# Altium PCB LASERDIODE_FIX.PcbDoc (part 3 of 4)
Units mm, origin at the board's own origin, x right, y up, seen from the top; angles counter-clockwise.
Board outline 85 x 85 mm, 4 copper layers (Top Layer, Mid-Layer 1, Mid-Layer 2, Bottom Layer); 546 components, 363 nets, 1494 pads, 1079 vias.
Unrouted connection lines stored in the file: 1020.
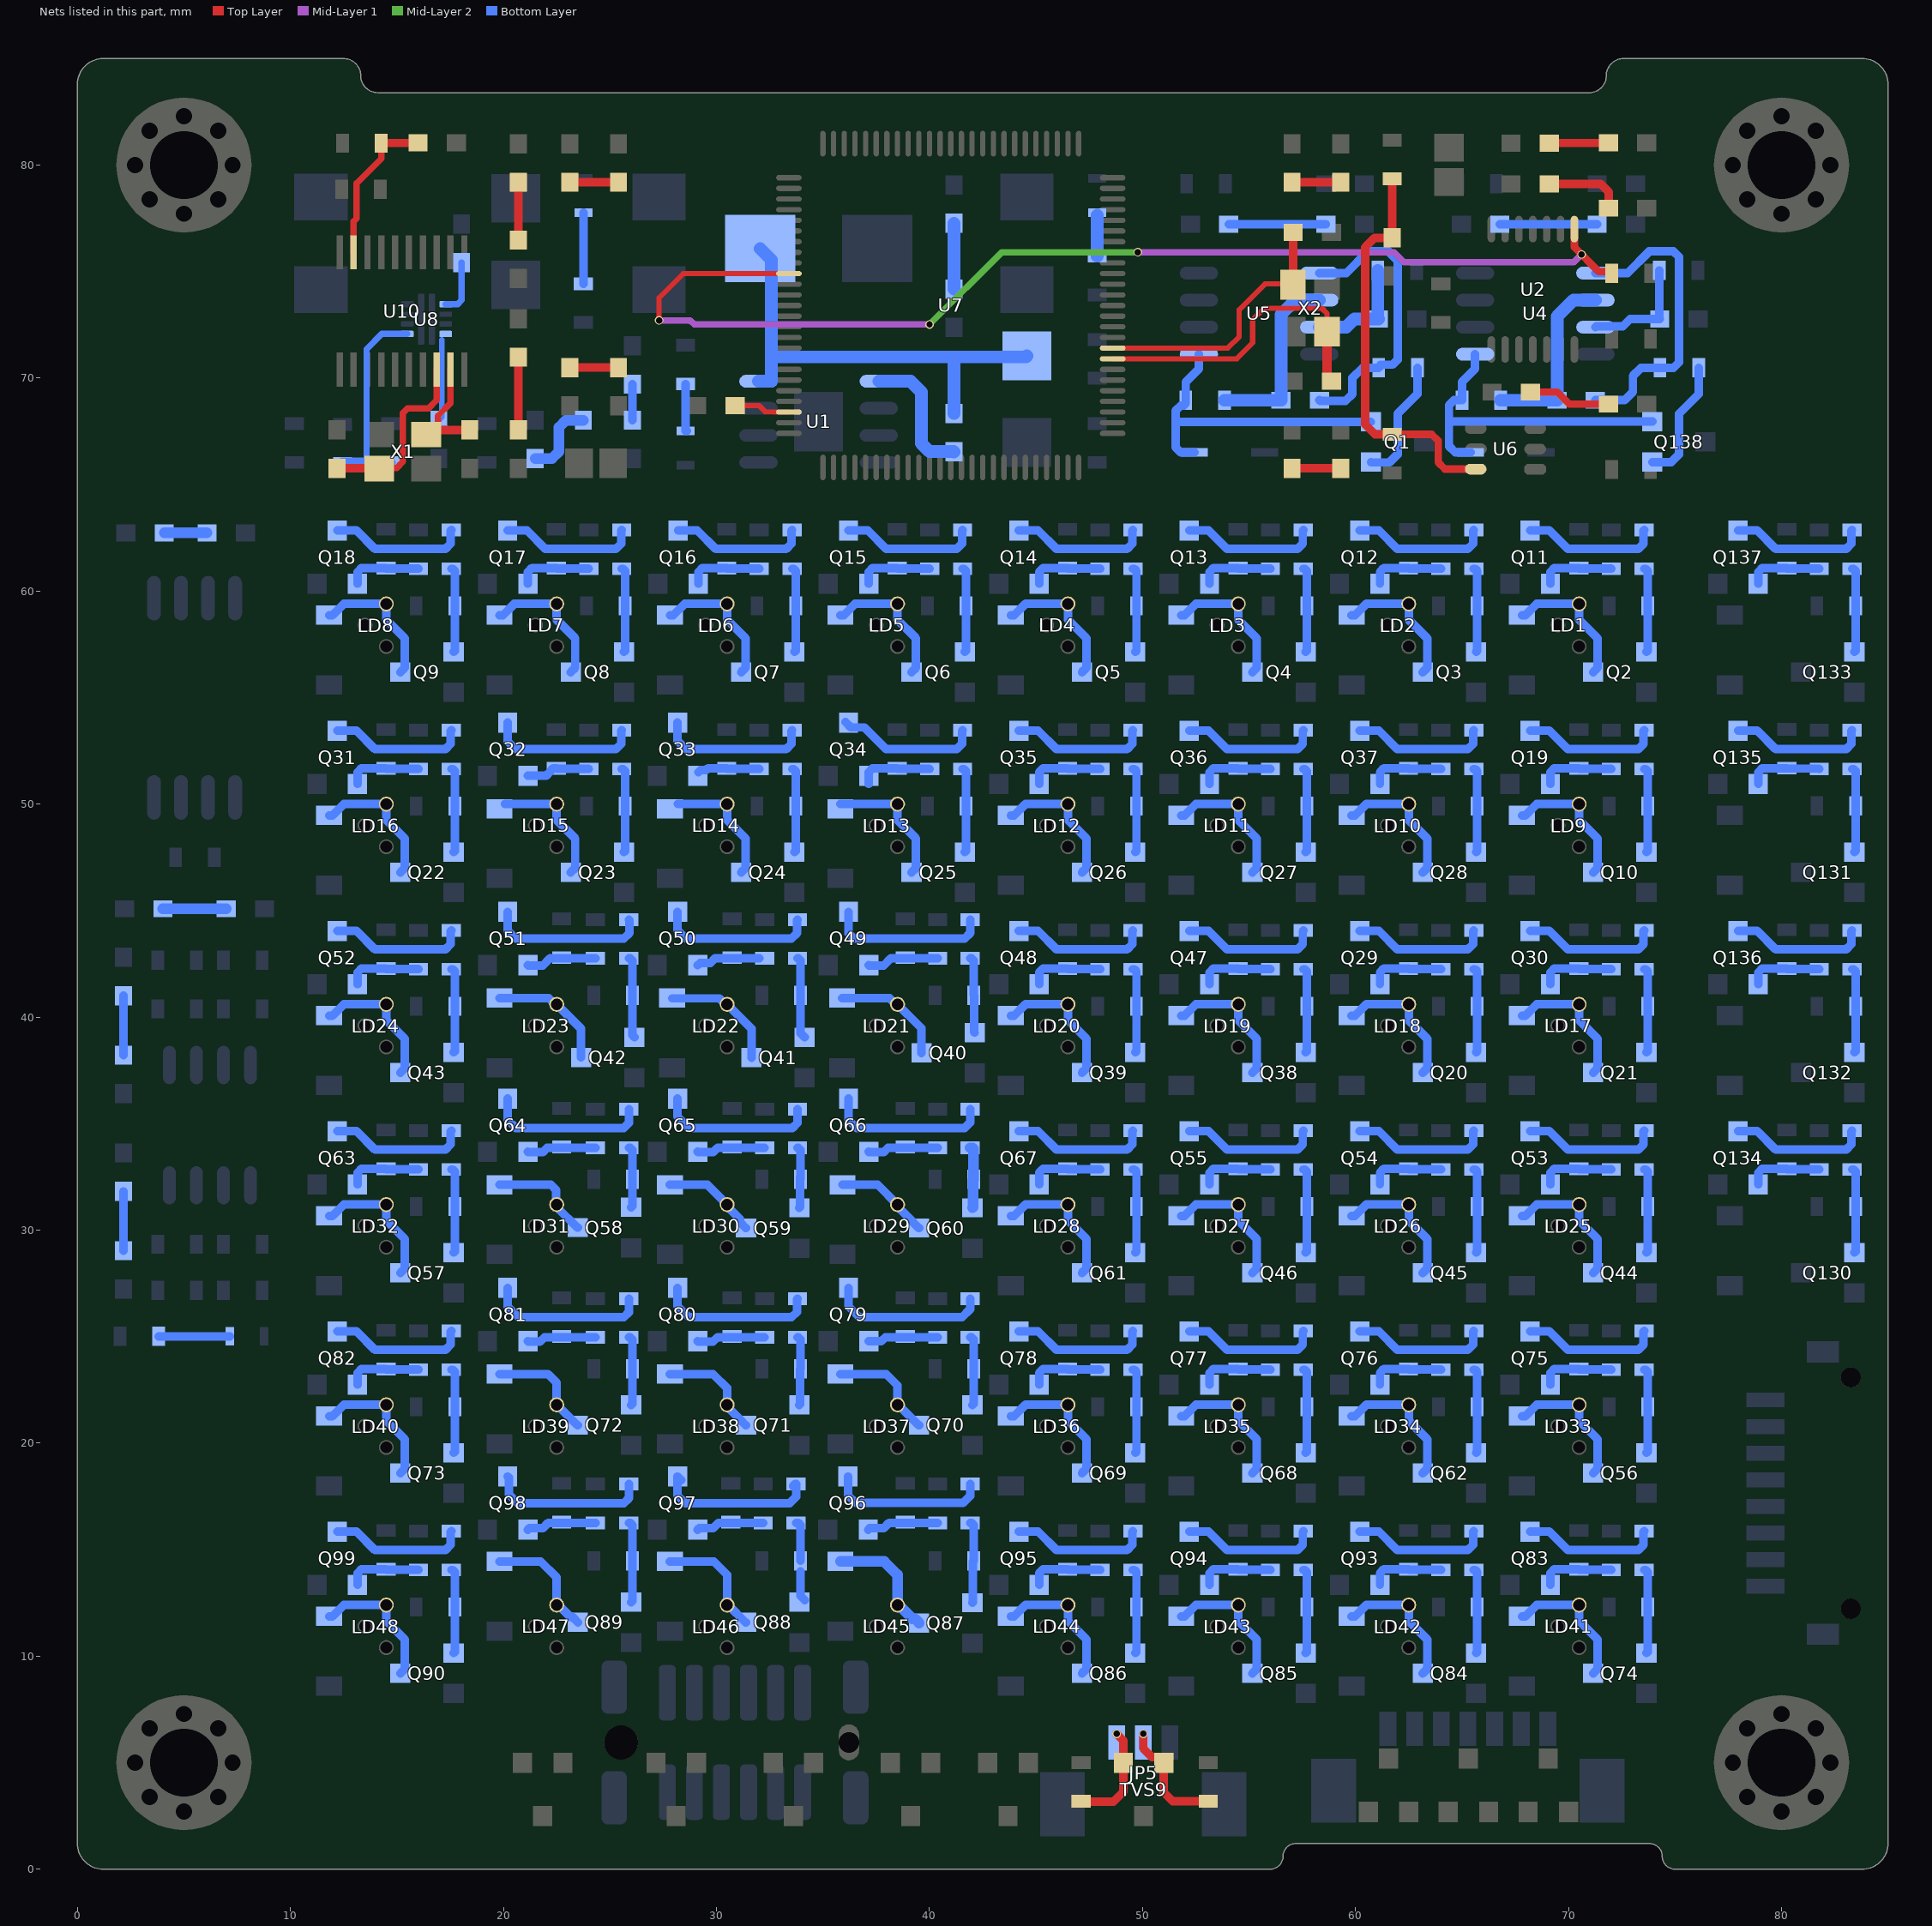
[diagram p5: the nets of this part, all layers, seen from the top]

## Via types
v1: diameter 0.4, hole 0.3, Top Layer to Bottom Layer, tented both sides, 1079 vias

## Nets (pads, with @x,y where several pads share a name; then routed paths per layer and width w, separated by ;. In a path a pad name is that pad's centre, name@x,y a point inside that pad or via, vN(x,y) a via of type N, cw(c..) or ccw(c..) an arc to the next point about the centre after c; other vN are vias at no path point) (continued)
LATCH: R218.2 U2.8 U7.85 | length 55.9
  Top Layer w0.25: v1@27.349,72.705 27.32,72.734 27.32,72.802 27.305,72.817 27.305,73.769 28.442,74.906 U7.85@33.4,74.906
  Top Layer w0.35: U2.8@70.276,76.993 70.276,76.141 71.415,75.001 71.91,75.001 72.001,74.911 R218.2@72.035,74.911
  Mid-Layer 1 w0.3: v1(27.305,72.705) 28.768,72.705 28.956,72.517 v1(40.005,72.517) ; v1(49.784,75.906) 61.813,75.906 62.281,75.438 70.247,75.438 v1(70.612,75.803)
  Mid-Layer 2 w0.3: v1(40.005,72.517) 43.394,75.906 v1(49.784,75.906)
NetC1_1: C1.1 C68.2 | length 3.7
  Bottom Layer w0.5: C1.1@21.488,66.22 22.278,66.22 22.606,66.548 22.606,67.691 22.935,68.02 C68.2@23.749,68.02
NetC3_2: C3.2 U8.10 | length 3.8
  Bottom Layer w0.25: C3.2@16.967,68.02 17.108,68.161 17.108,71.795
NetC4_2: C4.2 U8.7 | length 2.6
  Bottom Layer w0.3: U8.7@17.287,73.471 17.845,73.471 18.034,73.66 C4.2@18.034,75.427
NetC5_1: C5.1 D2.2 L1.1 U1.8 | length 21.7
  Bottom Layer w0.6: U1.8@31.973,69.85 32.572,69.85 32.572,70.993 ; L1.1@32.048,76.082 32.572,75.558 32.572,70.993 ; C5.1@41.148,68.337 41.148,70.993 ; D2.2@44.577,71.043 44.527,70.993 41.148,70.993 ; 32.572,70.993 41.148,70.993
NetC5_2: C5.2 U1.1 | length 6.3
  Bottom Layer w0.6: U1.1@37.623,69.85 39.116,69.85 39.624,69.342 39.624,66.929 40.005,66.548 41.137,66.548 C5.2@41.148,66.537
NetC6_2: C6.2 C12.1 | length 1.7
  Bottom Layer w0.4: C12.1@26.06,68.02 C6.2@26.06,69.712
NetC7_1: C7.1 R288.2 U10.19 | length 7.4
  Top Layer w0.3: U10.19@12.965,75.902 12.965,77.354 13.095,77.484 13.095,79.135 14.262,80.302 R288.2@14.262,81.026 R288.2@14.271,81.036
  Top Layer w0.4: R288.2@14.262,81.026 14.271,81.036 15.981,81.036 C7.1@15.991,81.045
NetC8_1: C8.1 U10.8 X1.3 | length 8.8
  Top Layer w0.3: X1.3@14.168,65.751 14.203,65.786 14.986,65.786 15.273,66.073 15.273,68.359 15.494,68.58 16.477,68.58 16.865,68.968 U10.8@16.865,70.402
  Top Layer w0.4: C8.1@12.192,65.764 14.154,65.764 X1.3@14.168,65.751
NetC9_2: C9.2 C15.1 | length 3.1
  Bottom Layer w0.6: C15.1@41.148,74.179 C9.2@41.148,77.268
NetC14_2: C14.2 C42.1 | length 2.8
  Bottom Layer w0.4: C42.1@2.159,38.214 C14.2@2.159,41.005
NetC19_1: C19.1 C63.2 | length 3.7
  Top Layer w0.4: C19.1@69.099,79.121 71.501,79.121 71.882,78.74 71.882,77.99 C63.2@71.871,77.979
NetC20_1: C20.1 C21.2 | length 3.9
  Top Layer w0.35: C20.1@68.21,69.342 69.469,69.342 70.032,68.779 C21.2@71.871,68.779
NetC22_2: C22.2 C26.1 | length 2
  Bottom Layer w0.5: C22.2@4.075,62.736 C26.1@6.085,62.736
NetC23_2: C23.2 C28.1 | length 3
  Bottom Layer w0.5: C23.2@4.012,45.085 C28.1@6.985,45.085
NetC24_2: C24.2 R309.2 U4.3 | length 5.5
  Bottom Layer w0.4: U4.3@71.265,72.39 71.303,72.428 72.555,72.428 72.898,72.771 C24.2@74.284,72.771 74.271,72.785 74.271,75.044 R309.2@74.257,75.057
NetC25_1: C25.1 R314.1 U4.2 | length 8.7
  Bottom Layer w0.6: R314.1@66.814,68.961 C25.1@69.458,68.961 69.469,68.972 69.469,72.898 70.231,73.66 U4.2@71.265,73.66
NetC25_2: C25.2 R311.1 U4.1 | length 14.5
  Bottom Layer w0.4: C25.2@71.258,68.961 72.635,68.961 73.025,69.351 73.025,70.104 73.405,70.484 R311.1@74.295,70.484 ; U4.1@71.265,74.93 72.771,74.93 73.787,75.946 74.93,75.946 75.184,75.692 75.184,70.739 74.93,70.485 R311.1@74.295,70.484
NetC27_1: C27.1 C29.2 | length 4.6
  Bottom Layer w0.4: C27.1@66.778,77.216 C29.2@71.342,77.216
NetC30_1: C30.1 C64.2 | length 2.8
  Top Layer w0.4: C30.1@69.099,81.026 69.109,81.036 71.861,81.036 C64.2@71.871,81.045
NetC32_1: C32.1 R316.2 R319.1 U6.6 | length 19.2
  Top Layer w0.35: R319.1@61.722,67.362 63.575,67.362 63.881,67.056 63.881,66.04 64.196,65.725 U6.6@65.644,65.725
  Top Layer w0.4: R319.1@61.722,67.362 60.914,67.362 60.452,67.823 60.452,76.143 60.89,76.581 61.711,76.581 C32.1@61.722,76.592 R316.2@61.722,79.357
NetC33_1: C33.1 C35.2 | length 4.6
  Bottom Layer w0.4: C33.1@54.05,77.216 C35.2@58.614,77.216
NetC34_2: C34.2 R99.2 U5.3 | length 5.2
  Bottom Layer w0.6: U5.3@58.299,72.39 59.563,72.39 59.944,72.771 C34.2@61.076,72.771 61.049,72.798 R99.2@61.049,75.057
NetC37_1: C37.1 R15.1 U5.2 | length 8.8
  Bottom Layer w0.6: R15.1@53.848,68.961 C37.1@56.504,68.961 56.504,72.985 57.179,73.66 U5.2@58.299,73.66
NetC37_2: C37.2 R14.1 U5.1 | length 13.9
  Bottom Layer w0.4: U5.1@58.299,74.93 59.563,74.93 60.579,75.946 61.554,75.946 61.976,75.524 61.976,70.866 61.74,70.63 61.187,70.63 61.187,70.584 R14.1@61.087,70.484 60.328,70.484 59.858,70.014 59.858,69.257 59.532,68.931 58.334,68.931 C37.2@58.304,68.961
NetC38_2: C38.2 C46.1 | length 2.3
  Top Layer w0.4: C46.1@23.114,79.193 C38.2@25.4,79.193
NetC39_2: C39.2 C47.1 | length 2.3
  Top Layer w0.4: C39.2@57.023,65.764 C47.1@59.309,65.764
NetC40_2: C40.2 C43.1 | length 2.8
  Bottom Layer w0.4: C43.1@2.159,29.031 C40.2@2.159,31.823
NetC41_1: C41.1 U10.9 X1.1 | length 5.7
  Top Layer w0.3: X1.1@16.368,67.351 16.468,67.351 16.681,67.564 16.918,67.801 16.918,68.226 17.515,68.823 U10.9@17.515,70.402
  Top Layer w0.4: X1.1@16.368,67.351 16.581,67.564 16.681,67.564 C41.1@18.415,67.564
NetC44_2: C44.2 C48.1 | length 2.3
  Top Layer w0.4: C44.2@57.023,79.193 C48.1@59.309,79.193
NetC45_2: C45.2 C49.1 | length 3.4
  Top Layer w0.4: C45.2@20.701,67.564 C49.1@20.701,70.982
NetC50_1: C50.1 U7.34 X2.3 | length 12.9
  Top Layer w0.25: U7.34@48.6,71.406 54.007,71.406 54.541,71.94 54.541,73.21 55.753,74.422 57.046,74.422 X2.3@57.075,74.392
  Top Layer w0.4: X2.3@57.062,74.379 57.075,74.392 C50.1@57.075,76.835
NetC52_1: C52.1 C57.2 | length 2.3
  Top Layer w0.4: C57.2@23.114,70.496 C52.1@25.4,70.496
NetC53_1: C53.1 C58.2 | length 2.7
  Top Layer w0.4: C53.1@20.701,76.476 C58.2@20.701,79.193
NetC55_2: C55.2 U7.98 | length 2.7
  Top Layer w0.25: C55.2@30.872,68.707 32.004,68.707 32.305,68.406 U7.98@33.4,68.406
NetC60_1: C60.1 U7.33 X2.1 | length 15.1
  Top Layer w0.25: U7.33@48.6,70.906 54.423,70.906 55.175,71.658 55.175,72.734 55.718,73.277 58.422,73.277 58.662,73.037 X2.1@58.662,72.179 ; 58.622,70.906 58.662,70.866
  Top Layer w0.4: C60.1@58.662,70.05 58.862,69.85 C60.1@58.876,69.85
  Top Layer w0.45: C60.1@58.662,70.05 58.662,70.866 X2.1@58.662,72.179
NetDIO1_2: DIO1.2 LD1.1 Q2.2 | length 6.6
  Bottom Layer w0.4: DIO1.2@67.818,58.867 67.973,58.867 68.506,59.4 LD1.1@70.5,59.4 70.5,58.652 71.367,57.785 71.367,56.402 Q2.2@71.16,56.195
NetDIO2_2: DIO2.2 LD2.1 Q3.2 | length 6.6
  Bottom Layer w0.4: DIO2.2@59.818,58.867 59.973,58.867 60.506,59.4 LD2.1@62.5,59.4 62.5,58.652 63.367,57.785 63.367,56.402 Q3.2@63.16,56.195
NetDIO3_2: DIO3.2 LD3.1 Q4.2 | length 6.6
  Bottom Layer w0.4: DIO3.2@51.818,58.867 51.973,58.867 52.506,59.4 LD3.1@54.5,59.4 54.5,58.652 55.367,57.785 55.367,56.402 Q4.2@55.16,56.195
NetDIO4_2: DIO4.2 LD4.1 Q5.2 | length 6.6
  Bottom Layer w0.4: DIO4.2@43.818,58.867 43.973,58.867 44.506,59.4 LD4.1@46.5,59.4 46.5,58.652 47.367,57.785 47.367,56.402 Q5.2@47.16,56.195
NetDIO5_2: DIO5.2 LD5.1 Q6.2 | length 6.6
  Bottom Layer w0.4: DIO5.2@35.818,58.867 35.973,58.867 36.506,59.4 LD5.1@38.5,59.4 38.5,58.652 39.367,57.785 39.367,56.402 Q6.2@39.16,56.195
NetDIO6_2: DIO6.2 LD6.1 Q7.2 | length 6.6
  Bottom Layer w0.4: DIO6.2@27.818,58.867 27.973,58.867 28.506,59.4 LD6.1@30.5,59.4 30.5,58.652 31.367,57.785 31.367,56.402 Q7.2@31.16,56.195
NetDIO7_2: DIO7.2 LD7.1 Q8.2 | length 6.6
  Bottom Layer w0.4: DIO7.2@19.818,58.867 19.973,58.867 20.506,59.4 LD7.1@22.5,59.4 22.5,58.652 23.367,57.785 23.367,56.402 Q8.2@23.16,56.195
NetDIO8_2: DIO8.2 LD8.1 Q9.2 | length 6.6
  Bottom Layer w0.4: DIO8.2@11.818,58.867 11.973,58.867 12.506,59.4 LD8.1@14.5,59.4 14.5,58.652 15.367,57.785 15.367,56.402 Q9.2@15.16,56.195
NetDIO9_2: DIO9.2 LD9.1 Q10.2 | length 6.6
  Bottom Layer w0.4: DIO9.2@67.818,49.467 67.973,49.467 68.506,50 LD9.1@70.5,50 70.5,49.252 71.367,48.385 71.367,47.002 Q10.2@71.16,46.795
NetDIO10_2: DIO10.2 LD18.1 Q20.2 | length 6.6
  Bottom Layer w0.4: DIO10.2@59.818,40.067 59.973,40.067 60.506,40.6 LD18.1@62.5,40.6 62.5,39.852 63.367,38.985 63.367,37.602 Q20.2@63.16,37.395
NetDIO11_2: DIO11.2 LD17.1 Q21.2 | length 6.6
  Bottom Layer w0.4: DIO11.2@67.818,40.067 67.973,40.067 68.506,40.6 LD17.1@70.5,40.6 70.5,39.852 71.367,38.985 71.367,37.602 Q21.2@71.16,37.395
NetDIO12_2: DIO12.2 LD16.1 Q22.2 | length 6.6
  Bottom Layer w0.4: DIO12.2@11.818,49.467 11.973,49.467 12.506,50 LD16.1@14.5,50 14.5,49.252 15.367,48.385 15.367,47.002 Q22.2@15.16,46.795
NetDIO13_2: DIO13.2 LD15.1 Q23.2 | length 6.1
  Bottom Layer w0.4: DIO13.2@20.066,50 LD15.1@22.5,50 ; LD15.1@22.5,50 22.5,49.252 23.367,48.385 23.367,47.002 Q23.2@23.16,46.795
NetDIO14_2: DIO14.2 LD14.1 Q24.2 | length 6
  Bottom Layer w0.4: DIO14.2@28.194,50 LD14.1@30.5,50 30.5,49.252 31.367,48.385 31.367,47.002 Q24.2@31.16,46.795
NetDIO15_2: DIO15.2 LD13.1 Q25.2 | length 6.3
  Bottom Layer w0.4: DIO15.2@35.814,50 LD13.1@38.5,50 38.5,49.252 39.367,48.385 39.367,47.002 Q25.2@39.16,46.795
NetDIO16_2: DIO16.2 LD12.1 Q26.2 | length 6.6
  Bottom Layer w0.4: DIO16.2@43.818,49.467 43.973,49.467 44.506,50 LD12.1@46.5,50 46.5,49.252 47.367,48.385 47.367,47.002 Q26.2@47.16,46.795
NetDIO17_2: DIO17.2 LD11.1 Q27.2 | length 6.6
  Bottom Layer w0.4: DIO17.2@51.818,49.467 51.973,49.467 52.506,50 LD11.1@54.5,50 54.5,49.252 55.367,48.385 55.367,47.002 Q27.2@55.16,46.795
NetDIO18_2: DIO18.2 LD10.1 Q28.2 | length 6.6
  Bottom Layer w0.4: DIO18.2@59.818,49.467 59.973,49.467 60.506,50 LD10.1@62.5,50 62.5,49.252 63.367,48.385 63.367,47.002 Q28.2@63.16,46.795
NetDIO19_2: DIO19.2 LD19.1 Q38.2 | length 6.6
  Bottom Layer w0.4: DIO19.2@51.818,40.067 51.973,40.067 52.506,40.6 LD19.1@54.5,40.6 54.5,39.852 55.367,38.985 55.367,37.602 Q38.2@55.16,37.395
NetDIO20_2: DIO20.2 LD20.1 Q39.2 | length 6.6
  Bottom Layer w0.4: DIO20.2@43.818,40.067 43.973,40.067 44.506,40.6 LD20.1@46.5,40.6 46.5,39.852 47.367,38.985 47.367,37.602 Q39.2@47.16,37.395
NetDIO21_2: DIO21.2 LD21.1 Q40.2 | length 5.5
  Bottom Layer w0.4: DIO21.2@35.896,40.894 38.125,40.894 38.419,40.6 LD21.1@38.5,40.6 39.625,39.475 Q40.2@39.625,38.32
NetDIO22_2: DIO22.2 LD22.1 Q41.2 | length 5.7
  Bottom Layer w0.4: DIO22.2@27.918,40.88 30.139,40.88 30.419,40.6 LD22.1@30.5,40.6 31.643,39.457 Q41.2@31.643,38.1
NetDIO23_2: DIO23.2 LD23.1 Q42.2 | length 5.8
  Bottom Layer w0.4: DIO23.2@19.818,40.894 22.125,40.894 22.419,40.6 LD23.1@22.5,40.6 23.648,39.452 Q42.2@23.648,38.105
NetDIO24_2: DIO24.2 LD24.1 Q43.2 | length 6.6
  Bottom Layer w0.4: DIO24.2@11.818,40.067 11.973,40.067 12.506,40.6 LD24.1@14.5,40.6 14.5,39.852 15.367,38.985 15.367,37.602 Q43.2@15.16,37.395
NetDIO25_2: DIO25.2 LD25.1 Q44.2 | length 6.6
  Bottom Layer w0.4: DIO25.2@67.818,30.667 67.973,30.667 68.506,31.2 LD25.1@70.5,31.2 70.5,30.452 71.367,29.585 71.367,28.202 Q44.2@71.16,27.995
NetDIO26_2: DIO26.2 LD26.1 Q45.2 | length 6.6
  Bottom Layer w0.4: DIO26.2@59.818,30.667 59.973,30.667 60.506,31.2 LD26.1@62.5,31.2 62.5,30.452 63.367,29.585 63.367,28.202 Q45.2@63.16,27.995
NetDIO27_2: DIO27.2 LD27.1 Q46.2 | length 6.6
  Bottom Layer w0.4: DIO27.2@51.818,30.667 51.973,30.667 52.506,31.2 LD27.1@54.5,31.2 54.5,30.452 55.367,29.585 55.367,28.202 Q46.2@55.16,27.995
NetDIO28_2: DIO28.2 LD32.1 Q57.2 | length 6.6
  Bottom Layer w0.4: DIO28.2@11.818,30.667 11.973,30.667 12.506,31.2 LD32.1@14.5,31.2 14.5,30.452 15.367,29.585 15.367,28.202 Q57.2@15.16,27.995
NetDIO29_2: DIO29.2 LD31.1 Q58.2 | length 5
  Bottom Layer w0.4: DIO29.2@19.818,32.131 22.225,32.131 22.479,31.877 22.479,31.221 LD31.1@22.5,31.2 22.557,31.143 22.557,31.033 23.47,30.12 Q58.2@23.495,30.12
NetDIO30_2: DIO30.2 LD30.1 Q59.2 | length 4.6
  Bottom Layer w0.4: DIO30.2@27.813,32.131 29.569,32.131 LD30.1@30.5,31.2 30.5,31.119 31.114,30.505 31.114,30.349 31.364,30.099 Q59.2@31.389,30.099
NetDIO31_2: DIO31.2 LD29.1 Q60.2 | length 4.5
  Bottom Layer w0.4: DIO31.2@35.918,32.131 37.569,32.131 LD29.1@38.5,31.2 38.557,31.143 38.557,31.059 39.242,30.374 39.242,30.349 39.492,30.099 Q60.2@39.517,30.099
NetDIO32_2: DIO32.2 LD28.1 Q61.2 | length 6.6
  Bottom Layer w0.4: DIO32.2@43.818,30.667 43.973,30.667 44.506,31.2 LD28.1@46.5,31.2 46.5,30.452 47.367,29.585 47.367,28.202 Q61.2@47.16,27.995
NetDIO33_2: DIO33.2 LD33.1 Q56.2 | length 6.6
  Bottom Layer w0.4: DIO33.2@67.818,21.267 67.973,21.267 68.506,21.8 LD33.1@70.5,21.8 70.5,21.052 71.367,20.185 71.367,18.802 Q56.2@71.16,18.595
NetDIO34_2: DIO34.2 LD34.1 Q62.2 | length 6.6
  Bottom Layer w0.4: DIO34.2@59.818,21.267 59.973,21.267 60.506,21.8 LD34.1@62.5,21.8 62.5,21.052 63.367,20.185 63.367,18.802 Q62.2@63.16,18.595
NetDIO35_2: DIO35.2 LD35.1 Q68.2 | length 6.6
  Bottom Layer w0.4: DIO35.2@51.818,21.267 51.973,21.267 52.506,21.8 LD35.1@54.5,21.8 54.5,21.052 55.367,20.185 55.367,18.802 Q68.2@55.16,18.595
NetDIO36_2: DIO36.2 LD37.1 Q70.2 | length 5.2
  Bottom Layer w0.4: DIO36.2@35.818,23.241 37.973,23.241 38.5,22.714 LD37.1@38.5,21.8 38.535,21.8 39.492,20.843 Q70.2@39.517,20.843
NetDIO37_2: DIO37.2 LD40.1 Q73.2 | length 6.6
  Bottom Layer w0.4: DIO37.2@11.818,21.267 11.973,21.267 12.506,21.8 LD40.1@14.5,21.8 14.5,21.052 15.367,20.185 15.367,18.802 Q73.2@15.16,18.595
NetDIO38_2: DIO38.2 LD36.1 Q69.2 | length 6.6
  Bottom Layer w0.4: DIO38.2@43.818,21.267 43.973,21.267 44.506,21.8 LD36.1@46.5,21.8 46.5,21.052 47.367,20.185 47.367,18.802 Q69.2@47.16,18.595
NetDIO39_2: DIO39.2 LD38.1 Q71.2 | length 5.1
  Bottom Layer w0.4: DIO39.2@27.813,23.241 29.845,23.241 30.5,22.586 LD38.1@30.5,21.8 30.5,21.719 31.114,21.105 31.114,21.093 31.364,20.843 Q71.2@31.389,20.843
NetDIO40_2: DIO40.2 LD39.1 Q72.2 | length 5.3
  Bottom Layer w0.4: DIO40.2@19.818,23.241 22.098,23.241 22.5,22.839 LD39.1@22.5,21.8 22.513,21.8 23.47,20.843 Q72.2@23.495,20.843
NetDIO41_2: DIO41.2 LD41.1 Q74.2 | length 6.6
  Bottom Layer w0.4: DIO41.2@67.818,11.867 67.973,11.867 68.506,12.4 LD41.1@70.5,12.4 70.5,11.652 71.367,10.785 71.367,9.402 Q74.2@71.16,9.195
NetDIO42_2: DIO42.2 LD42.1 Q84.2 | length 6.6
  Bottom Layer w0.4: DIO42.2@59.818,11.867 59.973,11.867 60.506,12.4 LD42.1@62.5,12.4 62.5,11.652 63.367,10.785 63.367,9.402 Q84.2@63.16,9.195
NetDIO43_2: DIO43.2 LD43.1 Q85.2 | length 6.6
  Bottom Layer w0.4: DIO43.2@51.818,11.867 51.973,11.867 52.506,12.4 LD43.1@54.5,12.4 54.5,11.652 55.367,10.785 55.367,9.402 Q85.2@55.16,9.195
NetDIO44_2: DIO44.2 LD45.1 Q87.2 | length 5.7
  Bottom Layer w0.5: DIO44.2@35.818,14.446 37.878,14.446 38.5,13.824 LD45.1@38.5,12.4 38.554,12.4 39.197,11.757 39.317,11.757 Q87.2@39.517,11.557
NetDIO45_2: DIO45.2 LD46.1 Q88.2 | length 5.6
  Bottom Layer w0.4: DIO45.2@27.813,14.446 29.877,14.446 30.5,13.823 LD46.1@30.5,12.4 30.551,12.4 31.364,11.587 Q88.2@31.389,11.587
NetDIO46_2: DIO46.2 LD44.1 Q86.2 | length 6.6
  Bottom Layer w0.4: DIO46.2@43.818,11.867 43.973,11.867 44.506,12.4 LD44.1@46.5,12.4 46.5,11.652 47.367,10.785 47.367,9.402 Q86.2@47.16,9.195
NetDIO47_2: DIO47.2 LD47.1 Q89.2 | length 5.6
  Bottom Layer w0.4: DIO47.2@19.818,14.446 21.749,14.446 22.5,13.695 LD47.1@22.5,12.4 22.581,12.4 23.145,11.837 23.245,11.837 Q89.2@23.495,11.587
NetDIO48_2: DIO48.2 LD48.1 Q90.2 | length 6.6
  Bottom Layer w0.4: DIO48.2@11.818,11.867 11.973,11.867 12.506,12.4 LD48.1@14.5,12.4 14.5,11.652 15.367,10.785 15.367,9.402 Q90.2@15.16,9.195
NetJP5_2: JP5.2 R303.2 TVS9.1 | length 5.6
  Top Layer w0.4: v1(50.038,6.35) 50.038,5.667 50.442,5.264 50.75,5.264 TVS9.1@51,5.014 ; TVS9.1@51,4.989 TVS9.1@51,5.014 ; R303.2@53.086,3.191 51.419,3.191 51,3.61 TVS9.1@51,5.014
NetJP5_3: JP5.3 R308.2 TVS9.3 | length 5
  Top Layer w0.4: R308.2@47.117,3.191 47.133,3.175 48.641,3.175 49.1,3.634 TVS9.3@49.1,4.989 49.1,6.038 v1(48.788,6.35)
NetLED1_2: LED1.2 R6.1 | length 1.9
  Bottom Layer w0.6: R6.1@47.874,75.721 47.879,75.721 LED1.2@47.879,77.641
NetLED2_1: LED2.1 R313.1 | length 2.3
  Bottom Layer w0.4: R313.1@28.55,69.723 28.55,67.517 LED2.1@28.61,67.517
NetLED3_2: LED3.2 R217.1 | length 3.4
  Bottom Layer w0.4: R217.1@23.749,74.422 23.751,74.425 23.751,77.772 LED3.2@23.754,77.772
NetLED4_1: LED4.1 R187.1 | length 3.4
  Bottom Layer w0.4: R187.1@3.809,25.014 7.159,25.014 LED4.1@7.159,25.019
NetQ1_1: Q1.1 R14.2 | length 5.9
  Bottom Layer w0.4: Q1.1@60.726,66.056 60.742,66.04 61.595,66.04 61.976,66.421 61.976,68.326 62.903,69.253 R14.2@62.903,70.484
NetQ1_2: Q1.2 R15.2 R17.2 U5.5 | length 15
  Bottom Layer w0.4: 51.554,67.939 51.554,66.745 51.788,66.511 R17.2@52.439,66.511 ; U5.5@52.649,71.12 52.649,70.429 52.032,69.812 52.032,68.811 51.932,68.711 51.796,68.711 51.562,68.477 51.562,67.939 Q1.2@60.709,67.939
NetQ2_1: Q2.1 R18.2 R27.2 | length 4
  Bottom Layer w0.4: R27.2@73.551,61.048 73.616,61.048 73.716,60.948 73.716,57.201 Q2.1@73.66,57.145
NetQ3_1: Q3.1 R19.2 R28.2 | length 4
  Bottom Layer w0.4: R28.2@65.551,61.048 65.616,61.048 65.716,60.948 65.716,57.201 Q3.1@65.66,57.145
NetQ4_1: Q4.1 R20.2 R29.2 | length 4
  Bottom Layer w0.4: R29.2@57.552,61.048 57.617,61.048 57.717,60.948 57.717,57.201 Q4.1@57.66,57.145
NetQ5_1: Q5.1 R21.2 R30.2 | length 4
  Bottom Layer w0.4: R30.2@49.552,61.048 49.617,61.048 49.717,60.948 49.717,57.201 Q5.1@49.66,57.145
NetQ6_1: Q6.1 R22.2 R31.2 | length 4
  Bottom Layer w0.4: R31.2@41.552,61.048 41.617,61.048 41.717,60.948 41.717,57.201 Q6.1@41.66,57.145
NetQ7_1: Q7.1 R23.2 R32.2 | length 4
  Bottom Layer w0.4: R32.2@33.552,61.048 33.617,61.048 33.717,60.948 33.717,57.201 Q7.1@33.66,57.145
NetQ8_1: Q8.1 R24.2 R33.2 | length 4
  Bottom Layer w0.4: R33.2@25.552,61.048 25.617,61.048 25.717,60.948 25.717,57.201 Q8.1@25.66,57.145
NetQ9_1: Q9.1 R25.2 R34.2 | length 4
  Bottom Layer w0.4: R34.2@17.552,61.048 17.617,61.048 17.717,60.948 17.717,57.201 Q9.1@17.66,57.145
NetQ10_1: Q10.1 R26.2 R35.2 | length 4
  Bottom Layer w0.4: R35.2@73.551,51.648 73.616,51.648 73.716,51.548 73.716,47.801 Q10.1@73.66,47.745
NetQ11_1: Q11.1 R36.2 R105.1 | length 3.5
  Bottom Layer w0.4: Q11.1@69.149,60.345 69.149,60.901 69.333,61.086 R105.1@70.485,61.086 70.504,61.067 71.99,61.067 R36.2@72.009,61.048
NetQ11_3: Q11.3 R27.1 | length 6.4
  Bottom Layer w0.4: Q11.3@68.199,62.845 69.101,62.845 69.97,61.976 73.272,61.976 73.526,62.23 73.526,62.838 R27.1@73.552,62.864
NetQ12_1: Q12.1 R37.2 R111.1 | length 3.5
  Bottom Layer w0.4: Q12.1@61.149,60.345 61.149,60.901 61.333,61.086 R111.1@62.485,61.086 62.504,61.067 63.99,61.067 R37.2@64.009,61.048
NetQ12_3: Q12.3 R28.1 | length 6.4
  Bottom Layer w0.4: Q12.3@60.199,62.845 61.101,62.845 61.97,61.976 65.272,61.976 65.526,62.23 65.526,62.838 R28.1@65.552,62.864
NetQ13_1: Q13.1 R38.2 R117.1 | length 3.5
  Bottom Layer w0.4: Q13.1@53.149,60.345 53.149,60.901 53.333,61.086 R117.1@54.485,61.086 54.504,61.067 55.99,61.067 R38.2@56.009,61.048
NetQ13_3: Q13.3 R29.1 | length 6.4
  Bottom Layer w0.4: Q13.3@52.199,62.845 53.101,62.845 53.97,61.976 57.272,61.976 57.526,62.23 57.526,62.838 R29.1@57.552,62.864
NetQ14_1: Q14.1 R39.2 R118.1 | length 3.5
  Bottom Layer w0.4: Q14.1@45.149,60.345 45.149,60.901 45.333,61.086 R118.1@46.485,61.086 46.504,61.067 47.99,61.067 R39.2@48.009,61.048
NetQ14_3: Q14.3 R30.1 | length 6.4
  Bottom Layer w0.4: Q14.3@44.199,62.845 45.101,62.845 45.97,61.976 49.272,61.976 49.526,62.23 49.526,62.838 R30.1@49.552,62.864
NetQ15_1: Q15.1 R40.2 R119.1 | length 3.5
  Bottom Layer w0.4: Q15.1@37.149,60.345 37.149,60.901 37.333,61.086 R119.1@38.485,61.086 38.504,61.067 39.99,61.067 R40.2@40.009,61.048
NetQ15_3: Q15.3 R31.1 | length 6.4
  Bottom Layer w0.4: Q15.3@36.199,62.845 37.101,62.845 37.97,61.976 41.272,61.976 41.526,62.23 41.526,62.838 R31.1@41.552,62.864
NetQ16_1: Q16.1 R41.2 R120.1 | length 3.5
  Bottom Layer w0.4: Q16.1@29.149,60.345 29.149,60.901 29.333,61.086 R120.1@30.485,61.086 30.504,61.067 31.99,61.067 R41.2@32.009,61.048
NetQ16_3: Q16.3 R32.1 | length 6.4
  Bottom Layer w0.4: Q16.3@28.199,62.845 29.101,62.845 29.97,61.976 33.272,61.976 33.526,62.23 33.526,62.838 R32.1@33.552,62.864
NetQ17_1: Q17.1 R42.2 R121.1 | length 3.5
  Bottom Layer w0.4: Q17.1@21.149,60.345 21.149,60.901 21.334,61.086 R121.1@22.485,61.086 22.504,61.067 23.99,61.067 R42.2@24.009,61.048
NetQ17_3: Q17.3 R33.1 | length 6.4
  Bottom Layer w0.4: Q17.3@20.199,62.845 21.101,62.845 21.97,61.976 25.272,61.976 25.526,62.23 25.526,62.838 R33.1@25.552,62.864
NetQ18_1: Q18.1 R43.2 R122.1 | length 3.5
  Bottom Layer w0.4: Q18.1@13.149,60.345 13.149,60.901 13.334,61.086 R122.1@14.485,61.086 14.504,61.067 15.99,61.067 R43.2@16.009,61.048
NetQ18_3: Q18.3 R34.1 | length 6.4
  Bottom Layer w0.4: Q18.3@12.199,62.845 13.101,62.845 13.97,61.976 17.272,61.976 17.526,62.23 17.526,62.838 R34.1@17.552,62.864
NetQ19_1: Q19.1 R44.2 R123.1 | length 3.5
  Bottom Layer w0.4: Q19.1@69.149,50.945 69.149,51.501 69.333,51.686 R123.1@70.485,51.686 70.504,51.667 71.99,51.667 R44.2@72.009,51.648
NetQ19_3: Q19.3 R35.1 | length 6.4
  Bottom Layer w0.4: Q19.3@68.199,53.445 69.101,53.445 69.97,52.576 73.272,52.576 73.526,52.83 73.526,53.438 R35.1@73.552,53.464
NetQ20_1: Q20.1 R45.2 R54.2 | length 4
  Bottom Layer w0.4: R54.2@65.551,42.248 65.616,42.248 65.716,42.148 65.716,38.401 Q20.1@65.66,38.345
NetQ21_1: Q21.1 R46.2 R55.2 | length 4
  Bottom Layer w0.4: R55.2@73.551,42.248 73.616,42.248 73.716,42.148 73.716,38.401 Q21.1@73.66,38.345
NetQ22_1: Q22.1 R47.2 R56.2 | length 4
  Bottom Layer w0.4: R56.2@17.552,51.648 17.617,51.648 17.717,51.548 17.717,47.801 Q22.1@17.66,47.745
NetQ23_1: Q23.1 R48.2 R57.2 | length 4
  Bottom Layer w0.4: R57.2@25.552,51.648 25.617,51.648 25.717,51.548 25.717,47.801 Q23.1@25.66,47.745
NetQ24_1: Q24.1 R49.2 R58.2 | length 4
  Bottom Layer w0.4: R58.2@33.552,51.648 33.617,51.648 33.717,51.548 33.717,47.801 Q24.1@33.66,47.745
NetQ25_1: Q25.1 R50.2 R59.2 | length 4
  Bottom Layer w0.4: R59.2@41.552,51.648 41.617,51.648 41.717,51.548 41.717,47.801 Q25.1@41.66,47.745
NetQ26_1: Q26.1 R51.2 R60.2 | length 4
  Bottom Layer w0.4: R60.2@49.552,51.648 49.617,51.648 49.717,51.548 49.717,47.801 Q26.1@49.66,47.745
NetQ27_1: Q27.1 R52.2 R61.2 | length 4
  Bottom Layer w0.4: R61.2@57.552,51.648 57.617,51.648 57.717,51.548 57.717,47.801 Q27.1@57.66,47.745
NetQ28_1: Q28.1 R53.2 R62.2 | length 4
  Bottom Layer w0.4: R62.2@65.551,51.648 65.616,51.648 65.716,51.548 65.716,47.801 Q28.1@65.66,47.745
NetQ29_1: Q29.1 R63.2 R124.1 | length 3.5
  Bottom Layer w0.4: Q29.1@61.149,41.545 61.149,42.101 61.333,42.286 R124.1@62.485,42.286 62.504,42.267 63.99,42.267 R63.2@64.009,42.248
NetQ29_3: Q29.3 R54.1 | length 6.4
  Bottom Layer w0.4: Q29.3@60.199,44.045 61.101,44.045 61.97,43.176 65.272,43.176 65.526,43.43 65.526,44.038 R54.1@65.552,44.064
NetQ30_1: Q30.1 R64.2 R125.1 | length 3.5
  Bottom Layer w0.4: Q30.1@69.149,41.545 69.149,42.101 69.333,42.286 R125.1@70.485,42.286 70.504,42.267 71.99,42.267 R64.2@72.009,42.248
NetQ30_3: Q30.3 R55.1 | length 6.4
  Bottom Layer w0.4: Q30.3@68.199,44.045 69.101,44.045 69.97,43.176 73.272,43.176 73.526,43.43 73.526,44.038 R55.1@73.552,44.064
NetQ31_1: Q31.1 R65.2 R126.1 | length 3.5
  Bottom Layer w0.4: Q31.1@13.149,50.945 13.149,51.501 13.334,51.686 R126.1@14.485,51.686 14.504,51.667 15.99,51.667 R65.2@16.009,51.648
NetQ31_3: Q31.3 R56.1 | length 6.4
  Bottom Layer w0.4: Q31.3@12.199,53.445 13.101,53.445 13.97,52.576 17.272,52.576 17.526,52.83 17.526,53.438 R56.1@17.552,53.464
NetQ32_1: Q32.1 R66.2 R127.1 | length 3
  Bottom Layer w0.4: Q32.1@21.149,51.328 22.001,51.328 22.235,51.562 22.235,51.586 22.335,51.686 R127.1@22.485,51.686 22.504,51.667 23.99,51.667 R66.2@24.009,51.648
NetQ32_3: Q32.3 R57.1 | length 7.1
  Bottom Layer w0.4: Q32.3@20.199,53.828 20.199,52.953 20.576,52.576 25.272,52.576 25.526,52.83 25.526,53.438 R57.1@25.552,53.464
NetQ33_1: Q33.1 R67.2 R128.1 | length 3
  Bottom Layer w0.4: Q33.1@29.149,51.501 29.251,51.603 29.525,51.603 29.607,51.686 R128.1@30.485,51.686 30.504,51.667 31.99,51.667 R67.2@32.009,51.648
NetQ33_3: Q33.3 R58.1 | length 7.1
  Bottom Layer w0.4: Q33.3@28.173,53.828 28.173,52.98 28.577,52.576 33.272,52.576 33.526,52.83 33.526,53.438 R58.1@33.552,53.464
NetQ34_1: Q34.1 R68.2 R129.1 | length 3.5
  Bottom Layer w0.4: Q34.1@37.149,50.945 37.149,51.501 37.333,51.686 R129.1@38.485,51.686 38.504,51.667 39.99,51.667 R68.2@40.009,51.648
NetQ34_3: Q34.3 R59.1 | length 6.7
  Bottom Layer w0.4: Q34.3@36.061,53.848 36.308,53.601 36.945,53.601 37.97,52.576 41.272,52.576 41.526,52.83 41.526,53.438 R59.1@41.552,53.464
NetQ35_1: Q35.1 R69.2 R130.1 | length 3.5
  Bottom Layer w0.4: Q35.1@45.149,50.945 45.149,51.501 45.333,51.686 R130.1@46.485,51.686 46.504,51.667 47.99,51.667 R69.2@48.009,51.648
NetQ35_3: Q35.3 R60.1 | length 6.4
  Bottom Layer w0.4: Q35.3@44.199,53.445 45.101,53.445 45.97,52.576 49.272,52.576 49.526,52.83 49.526,53.438 R60.1@49.552,53.464
NetQ36_1: Q36.1 R70.2 R131.1 | length 3.5
  Bottom Layer w0.4: Q36.1@53.149,50.945 53.149,51.501 53.333,51.686 R131.1@54.485,51.686 54.504,51.667 55.99,51.667 R70.2@56.009,51.648
NetQ36_3: Q36.3 R61.1 | length 6.4
  Bottom Layer w0.4: Q36.3@52.199,53.445 53.101,53.445 53.97,52.576 57.272,52.576 57.526,52.83 57.526,53.438 R61.1@57.552,53.464
NetQ37_1: Q37.1 R71.2 R132.1 | length 3.5
  Bottom Layer w0.4: Q37.1@61.149,50.945 61.149,51.501 61.333,51.686 R132.1@62.485,51.686 62.504,51.667 63.99,51.667 R71.2@64.009,51.648
NetQ37_3: Q37.3 R62.1 | length 6.4
  Bottom Layer w0.4: Q37.3@60.199,53.445 61.101,53.445 61.97,52.576 65.272,52.576 65.526,52.83 65.526,53.438 R62.1@65.552,53.464
NetQ38_1: Q38.1 R72.2 R81.2 | length 4
  Bottom Layer w0.4: R81.2@57.552,42.248 57.617,42.248 57.717,42.148 57.717,38.401 Q38.1@57.66,38.345
NetQ39_1: Q39.1 R73.2 R82.2 | length 4
  Bottom Layer w0.4: R82.2@49.552,42.248 49.617,42.248 49.717,42.148 49.717,38.401 Q39.1@49.66,38.345
NetQ40_1: Q40.1 R74.2 R83.2 | length 3.6
  Bottom Layer w0.4: R83.2@41.908,42.756 41.973,42.756 42.073,42.656 R74.2@42.073,41.021 42.099,40.995 42.099,39.296 Q40.1@42.125,39.27
NetQ41_1: Q41.1 R75.2 R84.2 | length 3.9
  Bottom Layer w0.4: R84.2@33.806,42.756 33.847,42.756 33.947,42.656 33.947,39.246 Q41.1@34.143,39.05
NetQ42_1: Q42.1 R76.2 R85.2 | length 3.8
  Bottom Layer w0.4: R85.2@25.887,42.756 25.952,42.756 26.052,42.656 26.052,39.151 Q42.1@26.148,39.055
NetQ43_1: Q43.1 R77.2 R86.2 | length 4
  Bottom Layer w0.4: R86.2@17.552,42.248 17.617,42.248 17.717,42.148 17.717,38.401 Q43.1@17.66,38.345
NetQ44_1: Q44.1 R78.2 R87.2 | length 4
  Bottom Layer w0.4: R87.2@73.551,32.848 73.616,32.848 73.716,32.748 73.716,29.001 Q44.1@73.66,28.945
NetQ45_1: Q45.1 R79.2 R88.2 | length 4
  Bottom Layer w0.4: R88.2@65.551,32.848 65.616,32.848 65.716,32.748 65.716,29.001 Q45.1@65.66,28.945
NetQ46_1: Q46.1 R80.2 R89.2 | length 4
  Bottom Layer w0.4: R89.2@57.552,32.848 57.617,32.848 57.717,32.748 57.717,29.001 Q46.1@57.66,28.945
NetQ47_1: Q47.1 R90.2 R133.1 | length 3.5
  Bottom Layer w0.4: Q47.1@53.149,41.545 53.149,42.101 53.333,42.286 R133.1@54.485,42.286 54.504,42.267 55.99,42.267 R90.2@56.009,42.248
NetQ47_3: Q47.3 R81.1 | length 6.4
  Bottom Layer w0.4: Q47.3@52.199,44.045 53.101,44.045 53.97,43.176 57.272,43.176 57.526,43.43 57.526,44.038 R81.1@57.552,44.064
NetQ48_1: Q48.1 R91.2 R134.1 | length 3.5
  Bottom Layer w0.4: Q48.1@45.149,41.545 45.149,42.101 45.333,42.286 R134.1@46.485,42.286 46.504,42.267 47.99,42.267 R91.2@48.009,42.248
NetQ48_3: Q48.3 R82.1 | length 6.4
  Bottom Layer w0.4: Q48.3@44.199,44.045 45.101,44.045 45.97,43.176 49.272,43.176 49.526,43.43 49.526,44.038 R82.1@49.552,44.064
NetQ49_1: Q49.1 R92.2 R135.1 | length 3.4
  Bottom Layer w0.4: Q49.1@37.149,42.438 37.169,42.418 37.846,42.418 38.184,42.756 R92.2@40.385,42.756
NetQ49_3: Q49.3 R83.1 | length 7.5
  Bottom Layer w0.4: Q49.3@36.199,44.938 36.199,43.938 36.449,43.688 41.656,43.688 41.909,43.941 R83.1@41.909,44.572
NetQ50_1: Q50.1 R93.2 R136.1 | length 3
  Bottom Layer w0.4: Q50.1@29.123,42.438 29.23,42.545 29.718,42.545 29.929,42.756 R93.2@32.009,42.756
NetQ50_3: Q50.3 R84.1 | length 7.4
  Bottom Layer w0.4: Q50.3@28.173,44.938 28.173,44.09 28.575,43.688 33.528,43.688 33.782,43.942 33.782,44.548 R84.1@33.806,44.572
NetQ51_1: Q51.1 R94.2 R137.1 | length 3.3
  Bottom Layer w0.4: Q51.1@21.149,42.438 21.169,42.418 21.844,42.418 22.182,42.756 R94.2@24.317,42.756
NetQ51_3: Q51.3 R85.1 | length 7.5
  Bottom Layer w0.4: Q51.3@20.199,44.938 20.199,44.063 20.574,43.688 25.654,43.688 25.908,43.942 25.908,44.55 R85.1@25.887,44.572
NetQ52_1: Q52.1 R95.2 R138.1 | length 3.5
  Bottom Layer w0.4: Q52.1@13.149,41.545 13.149,42.101 13.334,42.286 R138.1@14.485,42.286 14.504,42.267 15.99,42.267 R95.2@16.009,42.248
NetQ52_3: Q52.3 R86.1 | length 6.4
  Bottom Layer w0.4: Q52.3@12.199,44.045 13.101,44.045 13.97,43.176 17.272,43.176 17.526,43.43 17.526,44.038 R86.1@17.552,44.064
NetQ53_1: Q53.1 R96.2 R139.1 | length 3.5
  Bottom Layer w0.4: Q53.1@69.149,32.145 69.149,32.701 69.333,32.886 R139.1@70.485,32.886 70.504,32.867 71.99,32.867 R96.2@72.009,32.848
NetQ53_3: Q53.3 R87.1 | length 6.4
  Bottom Layer w0.4: Q53.3@68.199,34.645 69.101,34.645 69.97,33.776 73.272,33.776 73.526,34.03 73.526,34.638 R87.1@73.552,34.664
NetQ54_1: Q54.1 R97.2 R140.1 | length 3.5
  Bottom Layer w0.4: Q54.1@61.149,32.145 61.149,32.701 61.333,32.886 R140.1@62.485,32.886 62.504,32.867 63.99,32.867 R97.2@64.009,32.848
NetQ54_3: Q54.3 R88.1 | length 6.4
  Bottom Layer w0.4: Q54.3@60.199,34.645 61.101,34.645 61.97,33.776 65.272,33.776 65.526,34.03 65.526,34.638 R88.1@65.552,34.664
NetQ55_1: Q55.1 R98.2 R141.1 | length 3.5
  Bottom Layer w0.4: Q55.1@53.149,32.145 53.149,32.701 53.333,32.886 R141.1@54.485,32.886 54.504,32.867 55.99,32.867 R98.2@56.009,32.848
NetQ55_3: Q55.3 R89.1 | length 6.4
  Bottom Layer w0.4: Q55.3@52.199,34.645 53.101,34.645 53.97,33.776 57.272,33.776 57.526,34.03 57.526,34.638 R89.1@57.552,34.664
NetQ56_1: Q56.1 R147.2 R156.2 | length 4
  Bottom Layer w0.4: R156.2@73.551,23.448 73.616,23.448 73.716,23.348 73.716,19.601 Q56.1@73.66,19.545
NetQ57_1: Q57.1 R100.2 R106.2 | length 4
  Bottom Layer w0.4: R106.2@17.552,32.848 17.617,32.848 17.717,32.748 17.717,29.001 Q57.1@17.66,28.945
NetQ58_1: Q58.1 R101.2 R107.2 | length 2.9
  Bottom Layer w0.4: R107.2@25.887,33.864 25.952,33.864 26.052,33.764 26.052,31.127 Q58.1@25.995,31.07
NetQ59_1: Q59.1 R102.2 R108.2 | length 3.1
  Bottom Layer w0.4: R108.2@33.806,33.864 33.847,33.864 33.947,33.764 R102.2@33.947,32.535 ; Q59.1@33.889,31.049 33.918,31.078 33.918,32.506 R102.2@33.947,32.535 ; R102.2@33.947,32.385 R102.2@33.947,32.535
NetQ60_1: Q60.1 R103.2 R109.2 | length 3
  Bottom Layer w0.5: R109.2@41.908,33.864 42.023,33.864 42.073,33.814 R103.2@42.073,32.385 42.045,32.357 42.045,31.077 Q60.1@42.017,31.049
NetQ61_1: Q61.1 R104.2 R110.2 | length 4
  Bottom Layer w0.4: R110.2@49.552,32.848 49.617,32.848 49.717,32.748 49.717,29.001 Q61.1@49.66,28.945
NetQ62_1: Q62.1 R152.2 R157.2 | length 4
  Bottom Layer w0.4: R157.2@65.551,23.448 65.616,23.448 65.716,23.348 65.716,19.601 Q62.1@65.66,19.545
NetQ63_1: Q63.1 R112.2 R142.1 | length 3.5
  Bottom Layer w0.4: Q63.1@13.149,32.145 13.149,32.701 13.334,32.886 R142.1@14.485,32.886 14.504,32.867 15.99,32.867 R112.2@16.009,32.848
NetQ63_3: Q63.3 R106.1 | length 6.4
  Bottom Layer w0.4: Q63.3@12.199,34.645 13.101,34.645 13.97,33.776 17.272,33.776 17.526,34.03 17.526,34.638 R106.1@17.552,34.664
NetQ64_1: Q64.1 R113.2 R143.1 | length 3.3
  Bottom Layer w0.4: Q64.1@21.149,33.675 21.169,33.655 21.844,33.655 22.053,33.864 R113.2@24.317,33.864
NetQ64_3: Q64.3 R107.1 | length 7.6
  Bottom Layer w0.4: Q64.3@20.199,36.175 20.199,35.173 20.574,34.798 25.652,34.798 25.887,35.032 R107.1@25.887,35.68
NetQ65_1: Q65.1 R114.2 R144.1 | length 3.2
  Bottom Layer w0.4: Q65.1@29.123,33.675 29.143,33.655 29.845,33.655 30.054,33.864 R114.2@32.263,33.864
NetQ65_3: Q65.3 R108.1 | length 7.4
  Bottom Layer w0.4: Q65.3@28.173,36.175 28.173,35.327 28.702,34.798 33.571,34.798 33.806,35.032 R108.1@33.806,35.68
NetQ66_1: Q66.1 R115.2 R145.1 | length 3.3
  Bottom Layer w0.4: Q66.1@37.149,33.675 37.169,33.655 37.846,33.655 38.055,33.864 R115.2@40.385,33.864
NetQ66_3: Q66.3 R109.1 | length 7.6
  Bottom Layer w0.4: Q66.3@36.199,36.175 36.199,35.175 36.576,34.798 41.656,34.798 41.909,35.051 R109.1@41.909,35.68
NetQ67_1: Q67.1 R116.2 R146.1 | length 3.5
  Bottom Layer w0.4: Q67.1@45.149,32.145 45.149,32.701 45.333,32.886 R146.1@46.485,32.886 46.504,32.867 47.99,32.867 R116.2@48.009,32.848
NetQ67_3: Q67.3 R110.1 | length 6.4
  Bottom Layer w0.4: Q67.3@44.199,34.645 45.101,34.645 45.97,33.776 49.272,33.776 49.526,34.03 49.526,34.638 R110.1@49.552,34.664
NetQ68_1: Q68.1 R148.2 R158.2 | length 4
  Bottom Layer w0.4: R158.2@57.552,23.448 57.617,23.448 57.717,23.348 57.717,19.601 Q68.1@57.66,19.545
NetQ69_1: Q69.1 R153.2 R159.2 | length 4
  Bottom Layer w0.4: R159.2@49.552,23.448 49.617,23.448 49.717,23.348 49.717,19.601 Q69.1@49.66,19.545
NetQ70_1: Q70.1 R151.2 R160.2 | length 3.3
  Bottom Layer w0.4: R160.2@41.908,24.972 41.973,24.972 42.073,24.872 42.073,21.849 Q70.1@42.017,21.793
NetQ71_1: Q71.1 R149.2 R161.2 | length 3.3
  Bottom Layer w0.4: R161.2@33.806,24.972 33.847,24.972 33.947,24.872 R149.2@33.947,23.495 33.918,23.466 33.918,21.822 Q71.1@33.889,21.793
NetQ72_1: Q72.1 R154.2 R162.2 | length 3.3
  Bottom Layer w0.4: R162.2@25.887,24.972 25.952,24.972 26.052,24.872 26.052,21.849 Q72.1@25.995,21.793
NetQ73_1: Q73.1 R150.2 R163.2 | length 4
  Bottom Layer w0.4: R163.2@17.552,23.448 17.617,23.448 17.717,23.348 17.717,19.601 Q73.1@17.66,19.545
NetQ74_1: Q74.1 R155.2 R164.2 | length 4
  Bottom Layer w0.4: R164.2@73.551,14.048 73.616,14.048 73.716,13.948 73.716,10.201 Q74.1@73.66,10.145
NetQ75_1: Q75.1 R165.2 R174.1 | length 3.5
  Bottom Layer w0.4: Q75.1@69.149,22.745 69.149,23.301 69.333,23.486 R174.1@70.485,23.486 70.504,23.467 71.99,23.467 R165.2@72.009,23.448
NetQ75_3: Q75.3 R156.1 | length 6.4
  Bottom Layer w0.4: Q75.3@68.199,25.245 69.101,25.245 69.97,24.376 73.272,24.376 73.526,24.63 73.526,25.238 R156.1@73.552,25.264
NetQ76_1: Q76.1 R166.2 R175.1 | length 3.5
  Bottom Layer w0.4: Q76.1@61.149,22.745 61.149,23.301 61.333,23.486 R175.1@62.485,23.486 62.504,23.467 63.99,23.467 R166.2@64.009,23.448
NetQ76_3: Q76.3 R157.1 | length 6.4
  Bottom Layer w0.4: Q76.3@60.199,25.245 61.101,25.245 61.97,24.376 65.272,24.376 65.526,24.63 65.526,25.238 R157.1@65.552,25.264
NetQ77_1: Q77.1 R167.2 R176.1 | length 3.5
  Bottom Layer w0.4: Q77.1@53.149,22.745 53.149,23.301 53.333,23.486 R176.1@54.485,23.486 54.504,23.467 55.99,23.467 R167.2@56.009,23.448
NetQ77_3: Q77.3 R158.1 | length 6.4
  Bottom Layer w0.4: Q77.3@52.199,25.245 53.101,25.245 53.97,24.376 57.272,24.376 57.526,24.63 57.526,25.238 R158.1@57.552,25.264
NetQ78_1: Q78.1 R168.2 R177.1 | length 3.5
  Bottom Layer w0.4: Q78.1@45.149,22.745 45.149,23.301 45.333,23.486 R177.1@46.485,23.486 46.504,23.467 47.99,23.467 R168.2@48.009,23.448
NetQ78_3: Q78.3 R159.1 | length 6.4
  Bottom Layer w0.4: Q78.3@44.199,25.245 45.101,25.245 45.97,24.376 49.272,24.376 49.526,24.63 49.526,25.238 R159.1@49.552,25.264
NetQ79_1: Q79.1 R169.2 R178.1 | length 3.3
  Bottom Layer w0.4: Q79.1@37.149,24.785 37.739,24.785 37.926,24.972 R169.2@40.385,24.972
NetQ79_3: Q79.3 R160.1 | length 7.4
  Bottom Layer w0.4: Q79.3@36.199,27.285 36.199,26.412 36.703,25.908 41.529,25.908 41.909,26.288 R160.1@41.909,26.788
NetQ80_1: Q80.1 R170.2 R179.1 | length 3.2
  Bottom Layer w0.4: Q80.1@29.123,24.785 29.143,24.765 29.845,24.765 30.052,24.972 R170.2@32.263,24.972
NetQ80_3: Q80.3 R161.1 | length 7.4
  Bottom Layer w0.4: Q80.3@28.173,27.285 28.173,26.437 28.702,25.908 33.528,25.908 33.782,26.162 33.782,26.764 R161.1@33.806,26.788
NetQ81_1: Q81.1 R171.2 R180.1 | length 3.3
  Bottom Layer w0.4: Q81.1@21.149,24.785 21.169,24.765 21.717,24.765 21.924,24.972 R171.2@24.317,24.972
NetQ81_3: Q81.3 R162.1 | length 7.5
  Bottom Layer w0.4: Q81.3@20.199,27.285 20.199,26.41 20.701,25.908 25.652,25.908 25.887,26.142 R162.1@25.887,26.788
NetQ82_1: Q82.1 R172.2 R181.1 | length 3.5
  Bottom Layer w0.4: Q82.1@13.149,22.745 13.149,23.301 13.334,23.486 R181.1@14.485,23.486 14.504,23.467 15.99,23.467 R172.2@16.009,23.448
NetQ82_3: Q82.3 R163.1 | length 6.4
  Bottom Layer w0.4: Q82.3@12.199,25.245 13.101,25.245 13.97,24.376 17.272,24.376 17.526,24.63 17.526,25.238 R163.1@17.552,25.264
NetQ83_1: Q83.1 R173.2 R182.1 | length 3.5
  Bottom Layer w0.4: Q83.1@69.149,13.345 69.149,13.901 69.333,14.086 R182.1@70.485,14.086 70.504,14.067 71.99,14.067 R173.2@72.009,14.048
NetQ83_3: Q83.3 R164.1 | length 6.4
  Bottom Layer w0.4: Q83.3@68.199,15.845 69.101,15.845 69.97,14.976 73.272,14.976 73.526,15.23 73.526,15.838 R164.1@73.552,15.864
NetQ84_1: Q84.1 R190.2 R192.2 | length 4
  Bottom Layer w0.4: R192.2@65.551,14.048 65.616,14.048 65.716,13.948 65.716,10.201 Q84.1@65.66,10.145
NetQ85_1: Q85.1 R188.2 R193.2 | length 4
  Bottom Layer w0.4: R193.2@57.552,14.048 57.617,14.048 57.717,13.948 57.717,10.201 Q85.1@57.66,10.145
NetQ86_1: Q86.1 R191.2 R194.2 | length 4
  Bottom Layer w0.4: R194.2@49.552,14.048 49.617,14.048 49.717,13.948 49.717,10.201 Q86.1@49.66,10.145
NetQ87_1: Q87.1 R183.2 R195.2 | length 3.9
  Bottom Layer w0.4: R195.2@41.908,16.26 41.973,16.26 42.073,16.16 R183.2@42.073,14.478 42.045,14.45 42.045,12.535 Q87.1@42.017,12.507
NetQ88_1: Q88.1 R189.2 R196.2 | length 3.4
  Bottom Layer w0.4: R196.2@33.737,16.26 33.847,16.26 33.947,16.16 R189.2@33.947,14.478 ; 33.947,13.97 33.947,12.83 Q88.1@34.143,12.634
NetQ89_1: Q89.1 R184.2 R197.2 | length 3.9
  Bottom Layer w0.4: R197.2@25.887,16.26 25.952,16.26 26.052,16.16 26.052,12.593 Q89.1@25.995,12.537
NetQ90_1: Q90.1 R186.2 R198.2 | length 4
  Bottom Layer w0.4: R198.2@17.552,14.048 17.617,14.048 17.717,13.948 17.717,10.201 Q90.1@17.66,10.145
NetQ93_1: Q93.1 R201.2 R210.1 | length 3.5
  Bottom Layer w0.4: Q93.1@61.149,13.345 61.149,13.901 61.333,14.086 R210.1@62.485,14.086 62.504,14.067 63.99,14.067 R201.2@64.009,14.048
NetQ93_3: Q93.3 R192.1 | length 6.4
  Bottom Layer w0.4: Q93.3@60.199,15.845 61.101,15.845 61.97,14.976 65.272,14.976 65.526,15.23 65.526,15.838 R192.1@65.552,15.864
NetQ94_1: Q94.1 R202.2 R211.1 | length 3.5
  Bottom Layer w0.4: Q94.1@53.149,13.345 53.149,13.901 53.333,14.086 R211.1@54.485,14.086 54.504,14.067 55.99,14.067 R202.2@56.009,14.048
NetQ94_3: Q94.3 R193.1 | length 6.4
  Bottom Layer w0.4: Q94.3@52.199,15.845 53.101,15.845 53.97,14.976 57.272,14.976 57.526,15.23 57.526,15.838 R193.1@57.552,15.864
NetQ95_1: Q95.1 R203.2 R212.1 | length 3.5
  Bottom Layer w0.4: Q95.1@45.149,13.345 45.149,13.901 45.333,14.086 R212.1@46.485,14.086 46.504,14.067 47.99,14.067 R203.2@48.009,14.048
NetQ95_3: Q95.3 R194.1 | length 6.4
  Bottom Layer w0.4: Q95.3@44.199,15.845 45.101,15.845 45.97,14.976 49.272,14.976 49.526,15.23 49.526,15.838 R194.1@49.552,15.864
NetQ96_1: Q96.1 R204.2 R213.1 | length 3.4
  Bottom Layer w0.4: Q96.1@37.126,15.937 37.191,16.002 37.846,16.002 38.104,16.26 R204.2@40.385,16.26
NetQ96_3: Q96.3 R195.1 | length 7.5
  Bottom Layer w0.4: Q96.3@36.176,18.437 36.176,17.545 36.531,17.19 41.574,17.19 41.909,17.525 R195.1@41.909,18.076
NetQ97_1: Q97.1 R205.2 R214.1 | length 3.2
  Bottom Layer w0.4: Q97.1@29.123,15.937 29.188,16.002 29.845,16.002 30.103,16.26 R205.2@32.194,16.26
NetQ97_3: Q97.3 R196.1 | length 7.7
  Bottom Layer w0.4: Q97.3@28.342,18.268 Q97.3@28.173,18.437 28.173,17.547 28.534,17.186 33.442,17.186 33.737,17.481 R196.1@33.737,18.076 33.694,18.076 R196.1@33.594,17.976
NetQ98_1: Q98.1 R206.2 R215.1 | length 3.3
  Bottom Layer w0.4: Q98.1@21.149,15.937 21.214,16.002 21.844,16.002 22.102,16.26 R206.2@24.317,16.26
NetQ98_3: Q98.3 R197.1 | length 7.4
  Bottom Layer w0.4: Q98.3@20.199,18.437 20.25,18.387 20.25,17.596 20.669,17.177 25.652,17.177 25.887,17.412 R197.1@25.887,18.076
NetQ99_1: Q99.1 R207.2 R216.1 | length 3.5
  Bottom Layer w0.4: Q99.1@13.149,13.345 13.149,13.901 13.334,14.086 R216.1@14.485,14.086 14.504,14.067 15.99,14.067 R207.2@16.009,14.048
NetQ99_3: Q99.3 R198.1 | length 6.4
  Bottom Layer w0.4: Q99.3@12.199,15.845 13.101,15.845 13.97,14.976 17.272,14.976 17.526,15.23 17.526,15.838 R198.1@17.552,15.864
NetQ130_1: Q130.1 R11.2 R12.2 | length 4
  Bottom Layer w0.4: R12.2@83.312,32.848 83.377,32.848 83.477,32.748 83.477,29.001 Q130.1@83.42,28.945
NetQ131_1: Q131.1 R10.2 R13.2 | length 4
  Bottom Layer w0.4: R13.2@83.312,51.649 83.377,51.649 83.477,51.549 83.477,47.803 Q131.1@83.42,47.746
NetQ132_1: Q132.1 R8.2 R16.2 | length 4
  Bottom Layer w0.4: R16.2@83.312,42.248 83.377,42.248 83.477,42.148 83.477,38.401 Q132.1@83.42,38.345
NetQ133_1: Q133.1 R9.2 R275.2 | length 4
  Bottom Layer w0.4: R275.2@83.312,61.048 83.377,61.048 83.477,60.948 83.477,57.201 Q133.1@83.42,57.145
NetQ134_1: Q134.1 R276.2 R296.1 | length 3.5
  Bottom Layer w0.4: Q134.1@78.909,32.145 78.909,32.701 79.094,32.886 R296.1@80.245,32.886 80.264,32.867 81.75,32.867 R276.2@81.769,32.848
NetQ134_3: Q134.3 R12.1 | length 6.4
  Bottom Layer w0.4: Q134.3@77.959,34.645 78.861,34.645 79.73,33.776 83.032,33.776 83.286,34.03 83.286,34.638 R12.1@83.312,34.664
NetQ135_1: Q135.1 R277.2 R297.1 | length 3.5
  Bottom Layer w0.4: Q135.1@78.909,50.946 78.909,51.503 79.094,51.687 R297.1@80.245,51.687 80.264,51.668 81.75,51.668 R277.2@81.769,51.649
NetQ135_3: Q135.3 R13.1 | length 6.4
  Bottom Layer w0.4: Q135.3@77.959,53.446 78.861,53.446 79.73,52.577 83.032,52.577 83.286,52.831 83.286,53.439 R13.1@83.312,53.465
NetQ136_1: Q136.1 R278.2 R298.1 | length 3.5
  Bottom Layer w0.4: Q136.1@78.909,41.545 78.909,42.101 79.094,42.286 R298.1@80.245,42.286 80.264,42.267 81.75,42.267 R278.2@81.769,42.248
NetQ136_3: Q136.3 R16.1 | length 6.4
  Bottom Layer w0.4: Q136.3@77.959,44.045 78.861,44.045 79.73,43.176 83.032,43.176 83.286,43.43 83.286,44.038 R16.1@83.312,44.064
NetQ137_1: Q137.1 R279.2 R299.1 | length 3.5
  Bottom Layer w0.4: Q137.1@78.909,60.345 78.909,60.901 79.094,61.086 R299.1@80.245,61.086 80.264,61.067 81.75,61.067 R279.2@81.769,61.048
NetQ137_3: Q137.3 R275.1 | length 6.4
  Bottom Layer w0.4: Q137.3@77.959,62.845 78.861,62.845 79.73,61.976 83.032,61.976 83.286,62.23 83.286,62.838 R275.1@83.312,62.864
NetQ138_1: Q138.1 R311.2 | length 5.8
  Bottom Layer w0.4: Q138.1@73.934,66.056 74.819,66.056 75.184,66.421 75.184,68.326 76.111,69.253 R311.2@76.111,70.484
NetQ138_2: Q138.2 R306.2 R314.2 U4.5 | length 15.6
  Bottom Layer w0.4: 64.516,67.956 Q138.2@73.934,67.956 ; R314.2@64.998,68.961 64.623,68.961 64.389,68.727 64.389,66.802 64.68,66.511 R306.2@65.405,66.511 ; R314.2@64.998,68.961 64.998,69.824 65.615,70.441 U4.5@65.615,71.12
NetR1_1: R1.1 R2.2 U8.1 | length 9.8
  Bottom Layer w0.25: R2.2@12.445,66.002 R2.2@12.464,66.021 ; R1.1@14.687,66.021 R1.1@14.706,66.04
  Bottom Layer w0.3: 13.575,66.021 13.575,71.36 14.286,72.071 U8.1@15.487,72.071
  Bottom Layer w0.5: R2.2@12.464,66.021 13.575,66.021 R1.1@14.687,66.021